# Altium PCB PCB1.PcbDoc
Units mil, origin at the board's own origin, x right, y up, seen from the top; angles counter-clockwise.
Board outline 2815 x 3170 mil, 2 copper layers (Top Layer, Bottom Layer); 8 components, 19 nets, 66 pads, 14 vias.
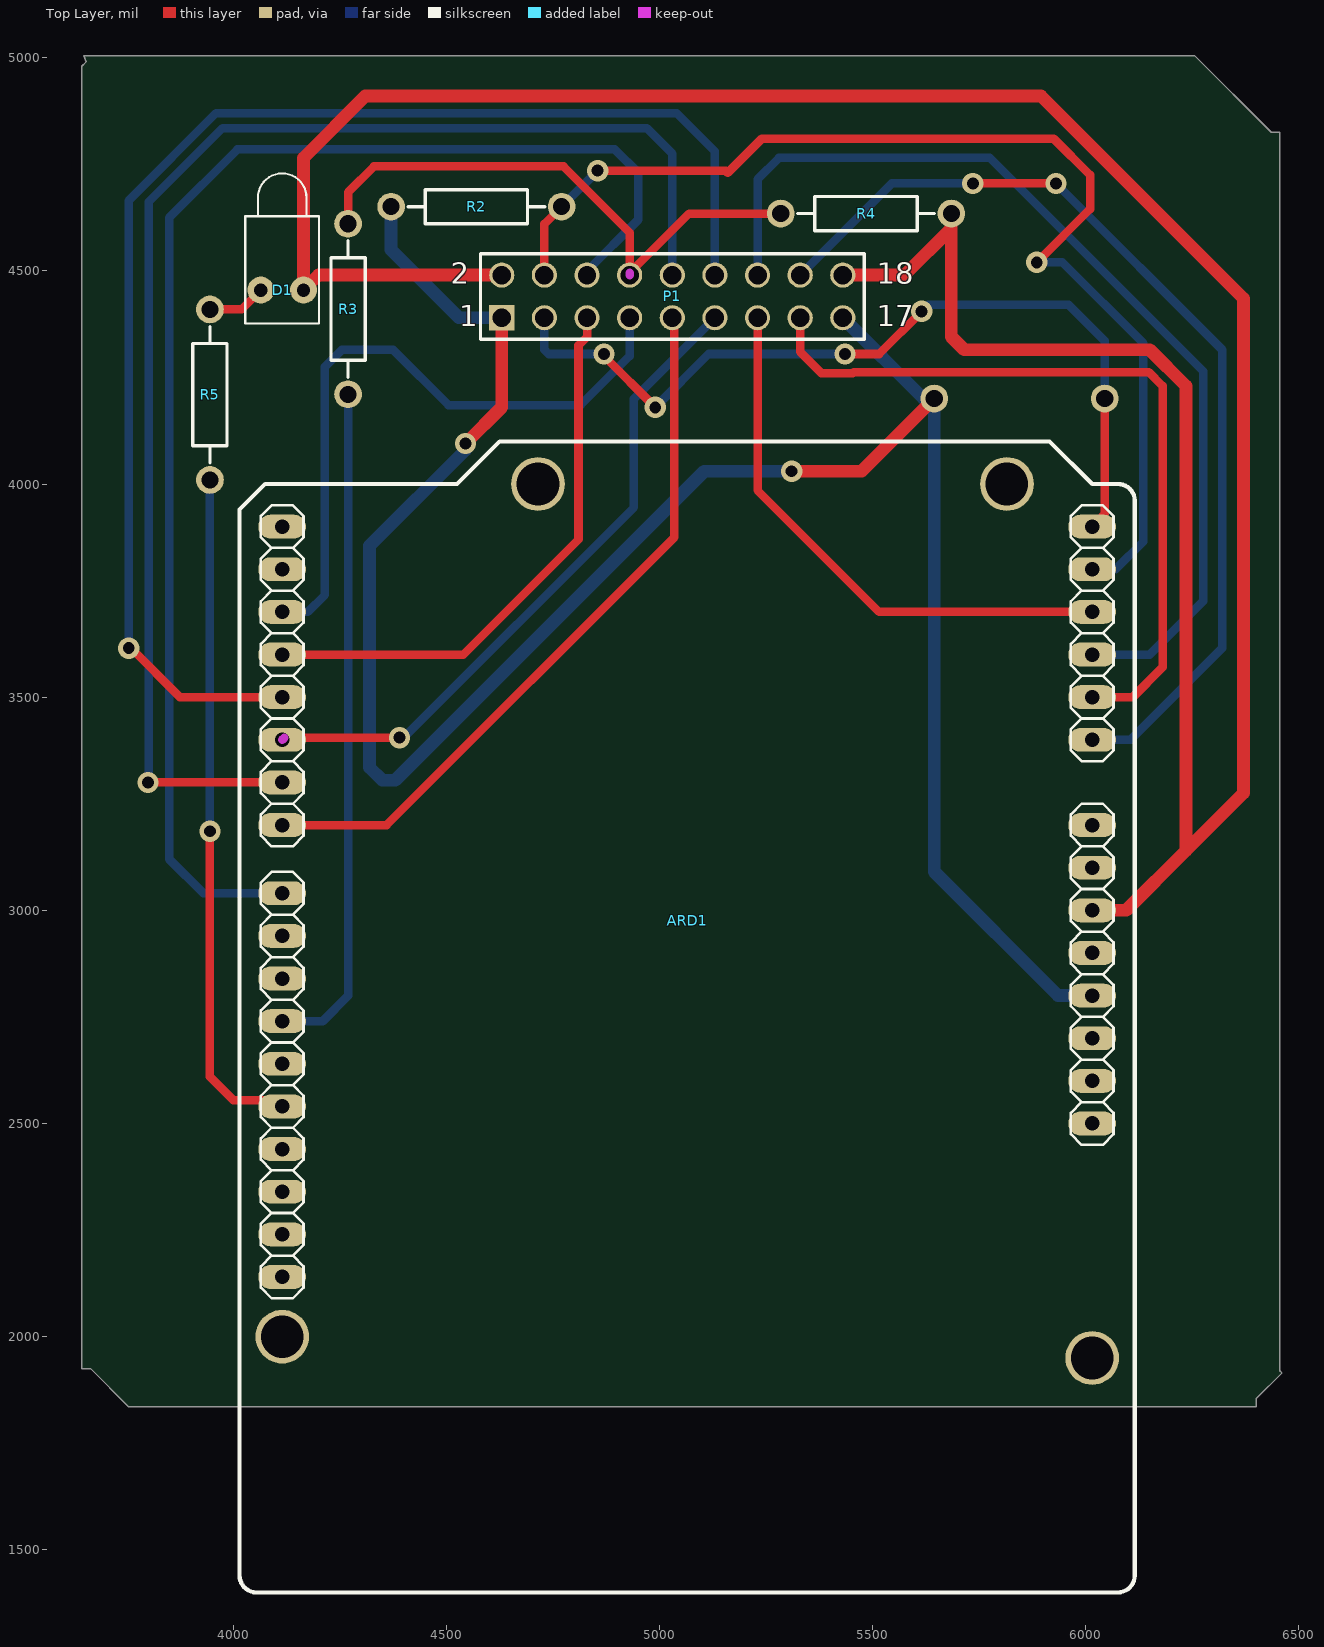
[diagram p0: Top Layer view]
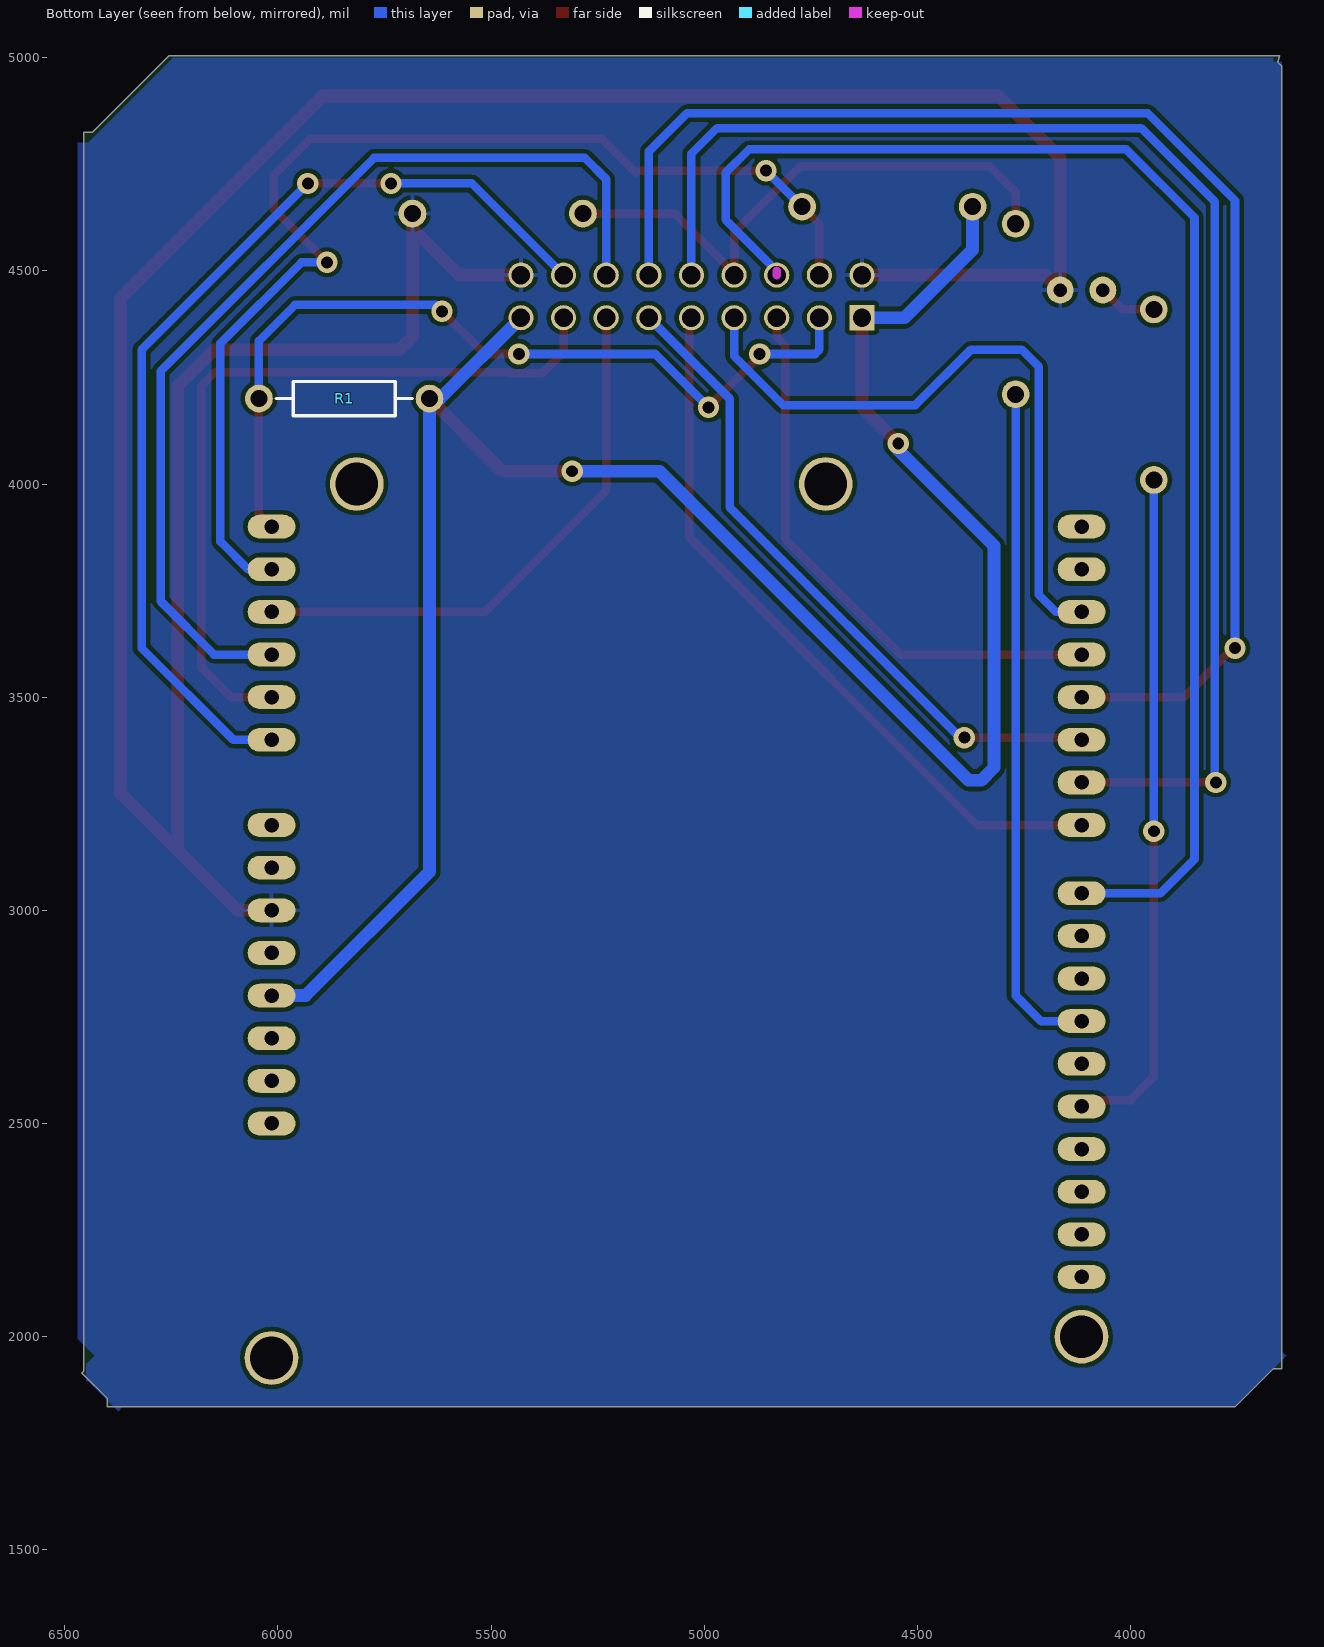
[diagram p1: Bottom Layer view, seen from below]

## Layer stack, top to bottom
Top Solder: solder mask 0.4, Solder Resist, Dk 3.5
Top Layer: signal copper 1.4
Dielectric 1: dielectric 12.6, FR-4, Dk 4.8
Bottom Layer: signal copper 1.4
Bottom Solder: solder mask 0.4, Solder Resist, Dk 3.5

## Board outline
3655,4990 3645,4980 3645,1925 3665,1925 3755,1835 6400,1835 6400,1855 6460,1915 6455,1920 6455,4825 6435,4825 6255,5005 3650,5005

## Design rules (kind name [scope] priority, off if disabled: settings)
Clearance [All] p1: gap=10 ignorepadtopadclearanceinfootprint=FALSE except(0: Arc-Hole Track-Hole SMDPad-Hole THPad-Hole Via-Hole Fill-Hole Poly-Hole Region-Hole Text-Hole)
DiffPairsRouting [All] p1: maxlimit=10 minlimit=10 mostfreqgap=10 toplayer_minwidth=15 toplayer_maxwidth=15 toplayer_prefwidth=15 bottomlayer_minwidth=15 bottomlayer_maxwidth=15 bottomlayer_prefwidth=15 substack1={8C59E57A-2C39-46B3-8825-457ADDF28157} toplayer_{8c59e57a-2c39-46b3-8825-457addf28157}_minwidth=15 toplayer_{8c59e57a-2c39-46b3-8825-457addf28157}_maxwidth=15 toplayer_{8c59e57a-2c39-46b3-8825-457addf28157}_prefwidth=15 bottomlayer_{8c59e57a-2c39-46b3-8825-457addf28157}_minwidth=15 bottomlayer_{8c59e57a-2c39-46b3-8825-457addf28157}_maxwidth=15 bottomlayer_{8c59e57a-2c39-46b3-8825-457addf28157}_prefwidth=15 maxuncoupledlength=500
PolygonConnect [All] p1: connectstyle=Relief reliefconductorwidth=10 reliefentries=4 polygonreliefangle="90 Angle" airgapwidth=10
RoutingVias [All] p1: holewidth=28 width=50 viastyle="Through Hole" minholewidth=28 minwidth=50 maxholewidth=28 maxwidth=50
SolderMaskExpansion [All] p1: expansion=4 istentingtop=FALSE
Width [All] p1: maxlimit=30 minlimit=20 preferedwidth=25 substack1={8C59E57A-2C39-46B3-8825-457ADDF28157}
29 further rules are at their usual default settings.

## Classes and differential pairs
component class Sheet1: ARD1 D1 P1 R1 R3 R4 R5

## Components (designator, comment, footprint, x,y, rotation, side; value= is the part's Value field where it differs from the comment)
ARD1 "Arduino uno" ARDUINO_UNO 6015,1950 r90 top
D1 "LED1" LED-1 4115,4455 r90 top
P1 "Header 9X2" HDR2X9 4630,4390 r0 top
R1 "470R" My_axial-0.4 5845,4200 r0 bottom value=1k
R2 "470R" My_axial-0.4 4570,4650 r180 top value=10K
R3 "470R" My_axial-0.4 4270,4410 r270 top value=4.7k
R4 "470R" My_axial-0.4 5485,4635 r0 top value=4.7k
R5 "470R" My_axial-0.4 3945,4210 r90 top value=220

## Footprints (in the part's own frame and the unit in brackets; to place one, negate y for a bottom-side part, rotate by r counter-clockwise, add the part's x,y. Pads: shape width x height; smd on the part's side, far side on the other; paste and mask are expansions set on the pad)
ARDUINO_UNO [mil] "ARDUINO_UNO"
  oval 56x112 hole 34: AD1(1450,0) AD2(1550,0) AD3(1650,0) AD4(1750,0) AD5(1850,0) AD6(1950,0) IOH1(1090,1900) IOH2(990,1900) IOH3(890,1900) IOH4(790,1900) IOH5(690,1900) IOH6(590,1900) IOH7(490,1900) IOH8(390,1900) IOH9(290,1900) IOH10(190,1900) IOL1(1950,1900) IOL2(1850,1900) IOL3(1750,1900) IOL4(1650,1900) IOL5(1550,1900) IOL6(1450,1900) IOL7(1350,1900) IOL8(1250,1900) POW1(550,0) POW2(650,0) POW3(750,0) POW4(850,0) POW5(950,0) POW6(1050,0) POW7(1150,0) POW8(1250,0)
  round 126 hole 100: H1(0,0) H2(2050,200) H3(2050,1300) H4(50,1900)
  silkscreen extent -550,-100 2150,2000
HDR2X9 [mm] "Connector; Header; 9x2 Position"
  rect 1.5x1.5 hole 1.1: 1(0,0)
  round 1.5 hole 1.1: 2(0,2.54) 3(2.54,0) 4(2.54,2.54) 5(5.08,0) 6(5.08,2.54) 7(7.62,0) 8(7.62,2.54) 9(10.16,0) 10(10.16,2.54) 11(12.7,0) 12(12.7,2.54) 13(15.24,0) 14(15.24,2.54) 15(17.78,0) 16(17.78,2.54) 17(20.32,0) 18(20.32,2.54)
  silkscreen extent -1.27,-1.27 21.59,3.81
LED-1 [mm] "LED; 2 Leads"
  round 1.6 hole 0.8: 1(0,1.27) 2(0,-1.27)
  silkscreen extent -2,-2.2 6.95,2.2
My_axial-0.4 [mil]
  round 65 hole 40: 1(-200.5,-0.5) 2(199.5,-0.5)
  silkscreen extent -160,-40 160,40

## Part data
ARD1: "Arduino UNO Connector"
D1: "Typical RED GaAs LED", LatestRevisionDate=08-Jul-2005, LatestRevisionNote="Mech Layer 1 removed.", PackageDescription="LED; 2 Leads", PackageReference=LED-1, Published=8-Jun-2000, Publisher="Altium Limited"
P1: "Header, 9-Pin, Dual row", LatestRevisionDate=17-Jul-2002, LatestRevisionNote="Re-released for DXP Platform.", Publisher="Altium Limited"
R1 R2 R3 R4 R5: library part Res, "resistor 1/4 wat"

## Via types
v1: diameter 50, hole 28, Top Layer to Bottom Layer, 14 vias

## Nets (pads, with @x,y where several pads share a name; then routed paths per layer and width w, separated by ;. In a path a pad name is that pad's centre, name@x,y a point inside that pad or via, vN(x,y) a via of type N, cw(c..) or ccw(c..) an arc to the next point about the centre after c; other vN are vias at no path point)
3.3V: ARD1.POW4 P1.1 P1.17 R1.1 R2.2 | length 5211.7
  Top Layer w30: v1(4545,4095) 4630,4180 P1.1 ; v1(5310,4030) 5474,4030 R1.1
  Bottom Layer w20: v1@4545,4080 v1(4545,4095)
  Bottom Layer w30: R2.2 4370.5,4549.5 4530,4390 P1.1 ; v1@4545,4080 4320,3855 4320,3335 4350,3305 4380,3305 5105,4030 v1(5310,4030) ; P1.17 5619.5,4200.5 R1.1 5644.5,3090.5 5935,2800 ARD1.POW4
D0: ARD1.AD1 P1.16 | length 2334.7
  Top Layer w20: v1(5735,4705) v1(5930,4705)
  Bottom Layer w20: P1.16 5545,4705 v1(5735,4705) ; v1(5930,4705) 6320,4315 6320,3615 6105,3400 ARD1.AD1
D1: ARD1.AD2 P1.15 | length 1819.2
  Top Layer w20: P1.15 5330,4310 5380,4260 5453.64,4260 5456.14,4262.5 6147.5,4262.5 6180,4230 6180,3570 6110,3500 ARD1.AD2
D2: ARD1.AD3 P1.14 | length 2349.6
  Bottom Layer w20: P1.14 5230,4715 5280,4765 5775,4765 6275,4265 6275,3725 6150,3600 ARD1.AD3
D3: ARD1.AD4 P1.13 | length 1308.1
  Top Layer w20: P1.13 5230,3985 5515,3700 ARD1.AD4
D4: ARD1.IOL5 P1.12 | length 3244.8
  Top Layer w20: v1(3755,3615) 3760,3615 3875,3500 ARD1.IOL5
  Bottom Layer w20: v1(3755,3615) 3755,4665 3960,4870 5040,4870 5130,4780 P1.12
D5: ARD1.IOL6 P1.11 | length 1571.5
  Top Layer w20: ARD1.IOL6@4120,3405 v1(4390,3405)
  Bottom Layer w20: v1(4390,3405) 4395,3400 4940,3945 4940,4200 P1.11
D6: ARD1.IOL7 P1.10 | length 3287.3
  Top Layer w20: v1(3800,3300) ARD1.IOL7
  Bottom Layer w20: v1(3800,3300) 3802.5,3302.5 3802.5,4662.5 3975,4835 4970,4835 5030,4775 P1.10
D7: ARD1.IOL8 P1.9 | length 1716.7
  Top Layer w20: ARD1.IOL8 4360,3200 5035,3875 5035,4385 P1.9
D11: ARD1.IOH4 R3.2 | length 1590.1
  Bottom Layer w20: ARD1.IOH4 4210,2740 4269.5,2799.5 R3.2
GND: ARD1.POW6 D1.2 P1.2 P1.18 R4.2 | length 7157.4
  Top Layer w30: P1.2 4200,4490 D1.2 4165,4765 4310,4910 5895,4910 6370,4435 6370,3275 6235,3140 ; P1.18 5575,4490 5684.5,4599.5 ; R4.2 5684.5,4599.5 ; ARD1.POW6 6095,3000 6235,3140 ; 5684.5,4599.5 5684.5,4345.5 5715,4315 6150,4315 6235,4230 6235,3140
HREF: ARD1.IOH1 P1.6 | length 3271.9
  Bottom Layer w20: ARD1.IOH1 3930,3040 3850,3120 3850,4625 4010,4785 4895,4785 4950,4730 4950,4620 P1.6@4830,4500
NetARD1_IOH6: ARD1.IOH6 R5.1 | length 1598.3
  Top Layer w20: v1(3945.5,3185.5) 3945.5,2609.5 4000,2555 4100,2555 ARD1.IOH6
  Bottom Layer w20: v1(3945.5,3185.5) R5.1
NetD1_1: D1.1 R5.2 | length 138.3
  Top Layer w20: R5.2 4019.5,4409.5 D1.1
PCLK: ARD1.IOL3 P1.7 | length 1574.6
  Bottom Layer w20: ARD1.IOL3 4175,3700 4215,3740 4215,4275 4255,4315 4375,4315 4505,4185 4815,4185 4930,4300 P1.7
SCL: ARD1.AD6 P1.3 R1.2 | length 2030.5
  Top Layer w20: v1(4870,4305) 4870,4300 v1(4990,4180) ; v1(5435,4305) 5515,4305 v1(5615,4405) ; ARD1.AD6 6044.5,3929.5 R1.2
  Bottom Layer w20: P1.3 4730,4315 4740,4305 v1(4870,4305) ; v1(4990,4180) 5115,4305 v1(5435,4305) ; v1(5615,4405) 5630,4420 5960,4420 6044.5,4335.5 R1.2
SDA: ARD1.AD5 P1.4 R2.1 | length 2719.6
  Top Layer w20: P1.4 4730,4610 R2.1 ; v1(4855,4735) 5155,4735 5160,4730 5240,4810 5925,4810 6010,4725 6010,4645 v1(5885,4520)
  Bottom Layer w20: R2.1 v1(4855,4735) ; v1(5885,4520) 5945,4520 6135,4330 6135,3865 6070,3800 ARD1.AD5
VSY: ARD1.IOL4 P1.5 | length 1335.1
  Top Layer w20: ARD1.IOL4 4540,3600 4810,3870 4810,4325 4830,4345 P1.5
XCLK: P1.8 R3.1 R4.1 | length 1331
  Top Layer w20: R3.1 4269.5,4684.5 4330,4745 4774.9,4745 4930,4589.9 4930,4495 5069.5,4634.5 R4.1
pads on no net: ARD1.H1 ARD1.H2 ARD1.H3 ARD1.H4 ARD1.IOH2 ARD1.IOH3 ARD1.IOH5 ARD1.IOH7 ARD1.IOH8 ARD1.IOH9 ARD1.IOH10 ARD1.IOL1 ARD1.IOL2 ARD1.POW1 ARD1.POW2 ARD1.POW3 ARD1.POW5 ARD1.POW7 ARD1.POW8

## Polygon pours and split planes (outlines as drawn)
GND on Bottom Layer "GND" (solid, pour order 0): 3665,5000 6245,5000 6445,4800 6470,4800 6470,1995 6430,1955 6450,1935 6450,1895 6445,1895 6375,1825 6365,1835 3755,1835 3635,1955 3645,1965 3645,4990 3665,4990

## Keep-outs
Top Layer:
  lines w20: 4115,3400 4120,3405 ; 4930,4490 4930,4495
Bottom Layer:
  lines w20: 4830,4490 4830,4500

## Text inside footprints (layer, text, board x,y; h text height)
P1: Top Overlay "2" at 4510,4470 h50; Top Overlay "1" at 4530,4370 h50; Top Overlay "17" at 5510,4370 h50; Top Overlay "18" at 5510,4470 h50